# Altium PCB huaynaggui.PcbDoc
Units mil, origin at the board's own origin, x right, y up, seen from the top; angles counter-clockwise.
Board outline 3346.53 x 2645.3 mil, 2 copper layers (Top Layer, Bottom Layer); 42 components, 58 nets, 220 pads, 21 vias.
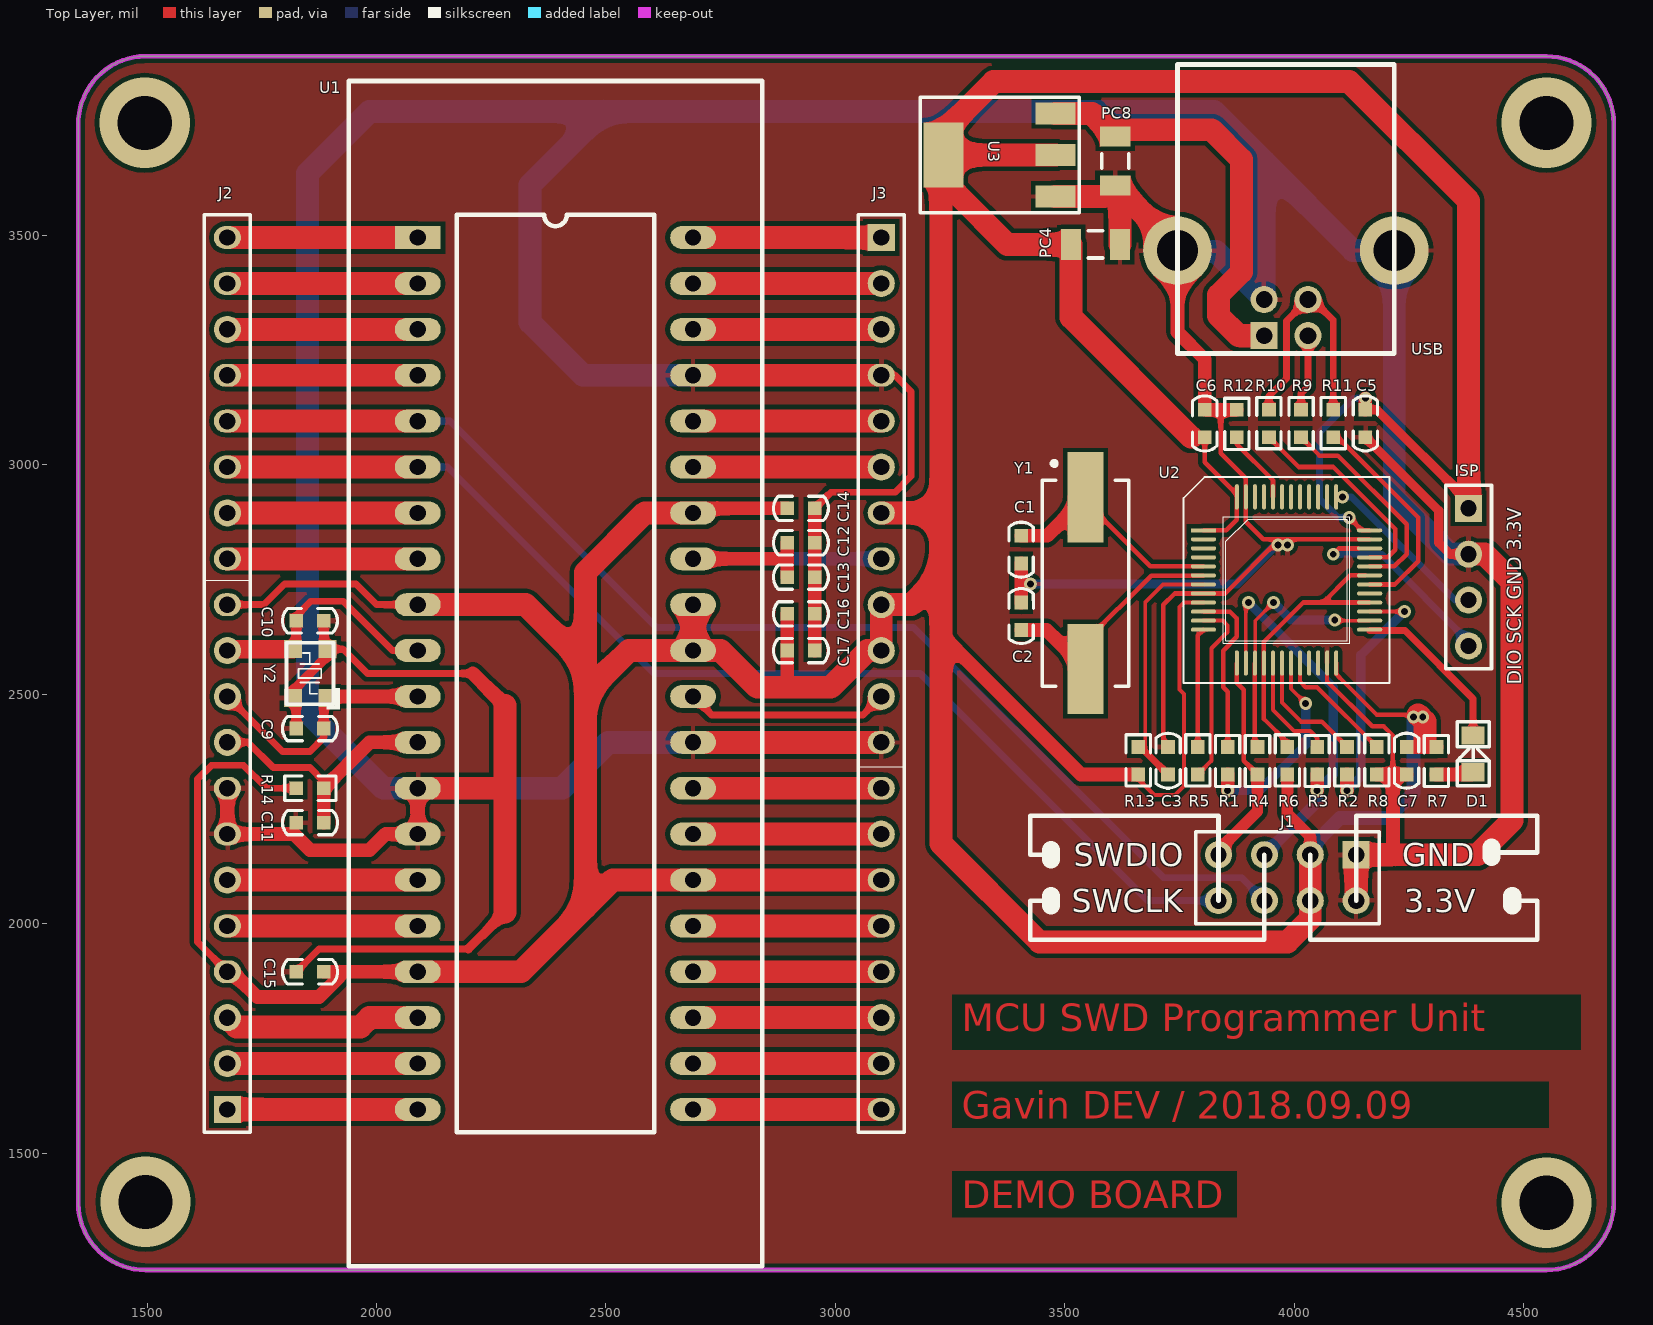
[diagram p0: Top Layer view]
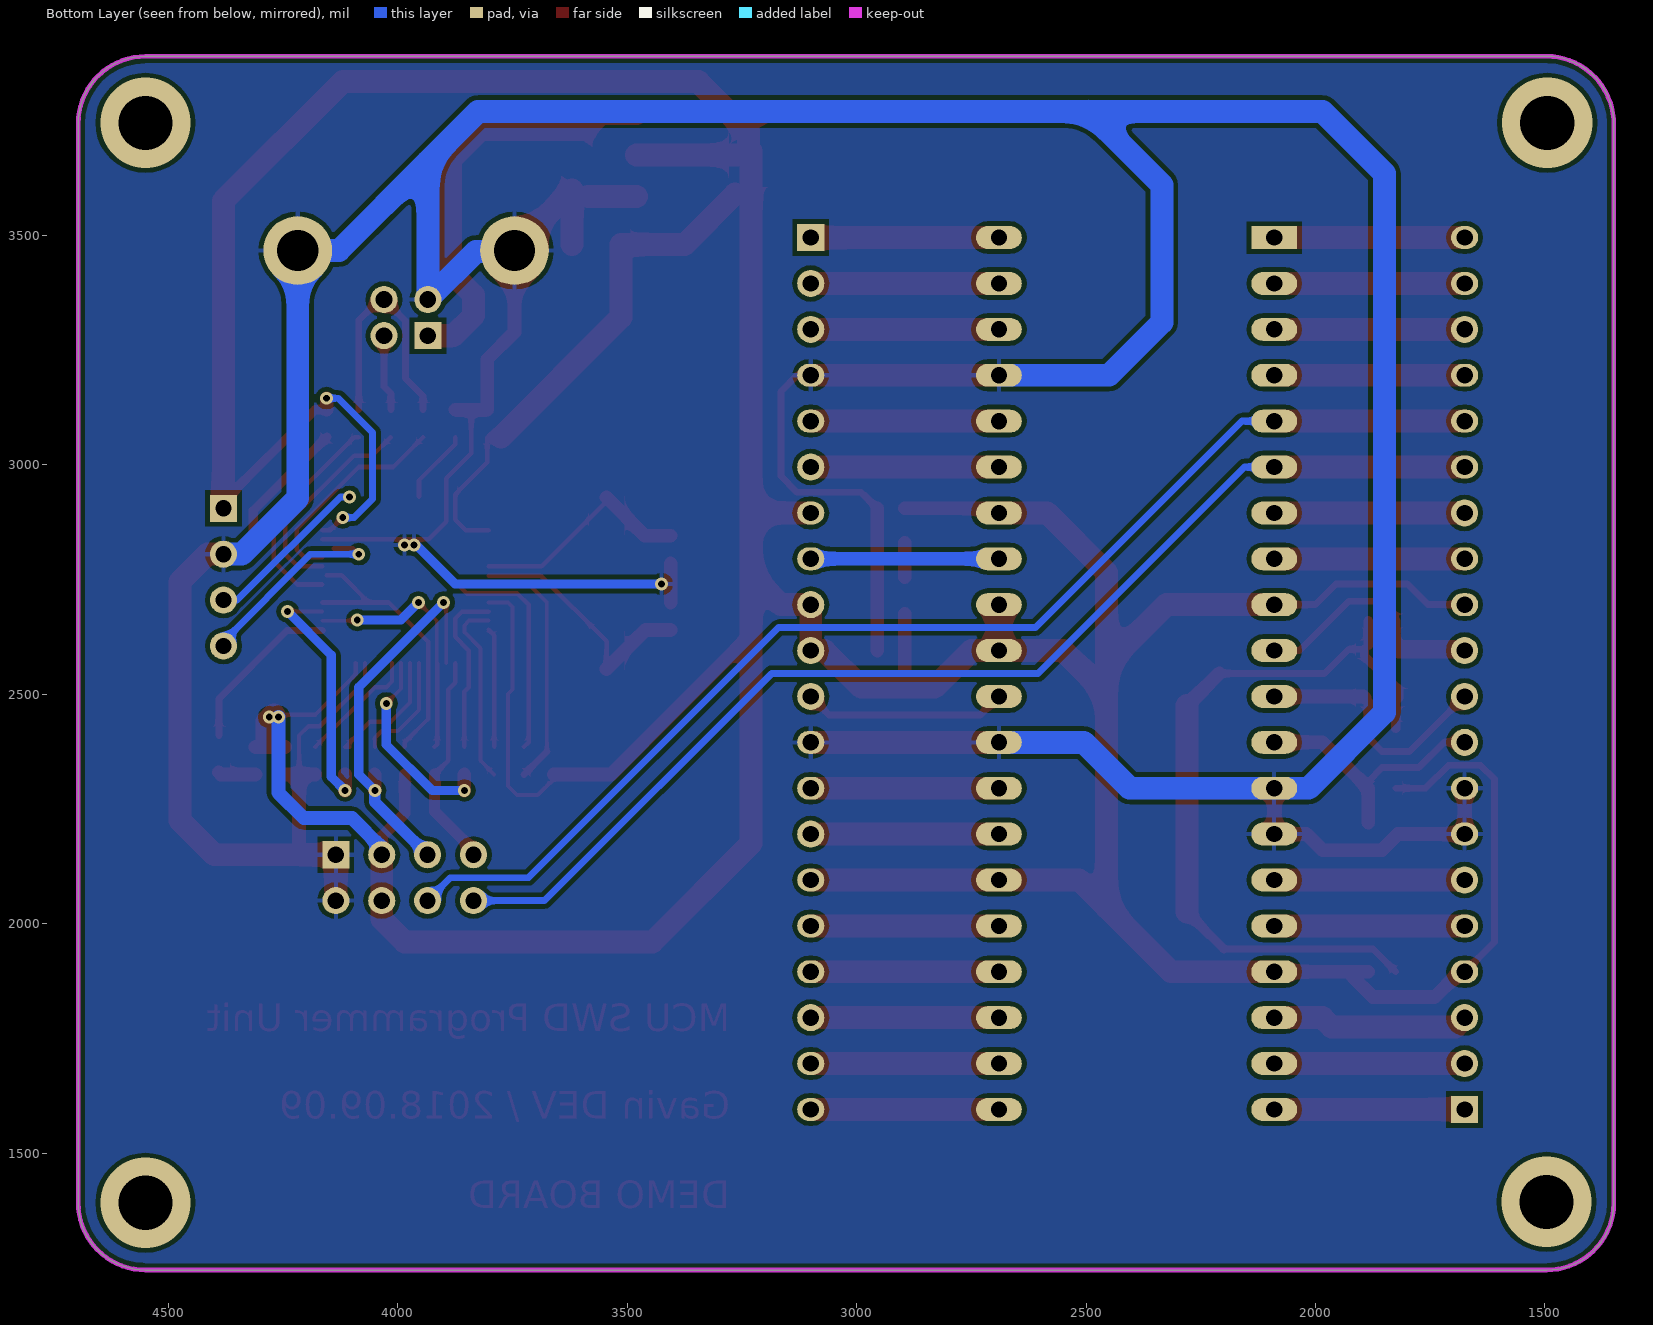
[diagram p1: Bottom Layer view, seen from below]

## Layer stack, top to bottom
Top Solder: solder mask 0.4, Solder Resist, Dk 3.5
Top Layer: signal copper 1.4
Dielectric 1: dielectric 12.6, FR-4, Dk 4.8
Bottom Layer: signal copper 1.4
Bottom Solder: solder mask 0.4, Solder Resist, Dk 3.5

## Board outline
1349.93,1390.03 ccw(c1496.38,1391.46) 1496.38,1245 4550,1245 ccw(c4550,1391.46) 4696.46,1391.46 4696.46,3743.54 ccw(c4550,3743.54) 4550,3890 1496.41,3890 1496.41,3890.3 ccw(c1497.48,3742.8) 1350,3740

## Design rules (kind name [scope] priority, off if disabled: settings)
Clearance [All] p1: gap=10 ignorepadtopadclearanceinfootprint=FALSE except(0: Arc-Hole Track-Hole SMDPad-Hole THPad-Hole Via-Hole Fill-Hole Poly-Hole Region-Hole Text-Hole)
PolygonConnect [All] p1: connectstyle=Relief reliefconductorwidth=10 reliefentries=4 polygonreliefangle="90 Angle" airgapwidth=10
RoutingVias [All] p1: holewidth=28 width=50 viastyle="Through Hole" minholewidth=28 minwidth=50 maxholewidth=28 maxwidth=50
SolderMaskExpansion [All] p1: expansion=4
Width [All] p1: maxlimit=500 minlimit=8 preferedwidth=10 minimp=50.000000 maximp=50.000000 favimp=50.000000
30 further rules are at their usual default settings.

## Components (designator, comment, footprint, x,y, rotation, side; value= is the part's Value field where it differs from the comment)
C1 "" C0603 3405,2845 r270 top value=22pF
C2 "" C0603 3405,2640 r90 top value=22pF
C3 "" C0603 3725,2325 r90 top value=0.1uF
C5 "" C0603 4155,3120 r270 top value=22pF
C6 "" C0603 3805,3060 r90 top value=22pF
C7 "" C0603 4245,2385 r270 top value=22pF
C9 "" C0603 1885,2425 r180 top value=10pF
C10 "" C0603 1825,2660 r0 top value=10pF
C11 "" C0603 1885,2220 r180 top value=0.1uF
C12 "" C0603 2895,2830 r0 top value=0.1uF
C13 "" C0603 2895,2755 r0 top value=1uF
C14 "" C0603 2895,2905 r0 top value=220nF
C15 "" C0603 1885,1895 r180 top value=10pF
C16 "" C0603 2895,2675 r0 top value=10uF
C17 "" C0603 2895,2595 r0 top value=1uF
D1 "LED" D-0805 4396,2370 r90 top
ISP "SWD" HDR1X4 4380,2905 r270 top (schematic designator ISP1)
J1 "Header2*4" HDR2X4 4135,2150 r180 top
J2 "Header1X20" HDR2.54-1X20 1675,1545 r90 top
J3 "Header1X20" HDR2.54-1X20 3100,3545 r270 top
PC4 "" C1206 3566.85,3480 r0 top value=100uF
PC8 "" C1206 3610,3661.85 r270 top value=100uF
R1 "" R0603 3855,2325 r90 top value=100
R2 "" R0603 4115,2385 r270 top value=100
R3 "" R0603 4050,2325 r90 top value=100
R4 "" R0603 3920,2325 r90 top value=100
R5 "" R0603 3790,2385 r270 top value=100
R6 "" r0603 3985,2385 r270 top value=1K
R7 "" R0603 4310,2325 r90 top value=1K
R8 "" R0603 4180,2385 r270 top value=10K
R9 "" R0603 4015,3120 r270 top value=100
R10 "" R0603 3945,3120 r270 top value=100
R11 "" R0603 4085,3120 r270 top value=1K
R12 "" R0603 3875,3060 r90 top value=10K
R13 "" R0603 3660,2385 r270 top value=10K
R14 "" R0603 1885,2295 r180 top value=10K
U1 "TestBench_40pin" DIP40 2390,3545 r0 top
U2 "STM32F103C8T6" LQFP-48 3984.25,2749.88 r0 top
U3 "AMS1117-3.3V" SOT-223 3373,3676.45 r90 top
USB "USB-B" USB-B 3934.33,3281.26 r0 top (schematic designator J4)
Y1 "8MHz" XTAL-SMD2 3545,2929.01 r270 top
Y2 "XTL-P4" X3225 1855,2545 r90 top

## Footprints (in the part's own frame and the unit in brackets; to place one, negate y for a bottom-side part, rotate by r counter-clockwise, add the part's x,y. Pads: shape width x height; smd on the part's side, far side on the other; paste and mask are expansions set on the pad)
C0603 [mil]
  rect 30x30 smd: 1(0,0) 2(60,0)
  silkscreen extent -30,-27 90,27, body extent -1,-16 62,15, height 24
C1206 [mm] "Chip Capacitor, Body 3.2x1.6mm, IPC High Density"
  rect 1.1x1.7 smd: 1(-1.35,0) 2(1.35,0)
  silkscreen extent -0.4,-0.75 0.4,0.75, body extent -1.7,-0.9 1.7,0.9, height 1.3
D-0805 [mil]
  rect 40x50 smd: 1(-40,6) 2(40,6)
  silkscreen extent -70,-29 70,41, body extent -40,-11 41,25, height 33
DIP40 [mm]
  rect 2.54x1.27 hole 0.9: 1(-7.62,-1.27)
  oval 2.54x1.27 hole 0.9: 2(-7.62,-3.81) 3(-7.62,-6.35) 4(-7.62,-8.89) 5(-7.62,-11.43) 6(-7.62,-13.97) 7(-7.62,-16.51) 8(-7.62,-19.05) 9(-7.62,-21.59) 10(-7.62,-24.13) 11(-7.62,-26.67) 12(-7.62,-29.21) 13(-7.62,-31.75) 14(-7.62,-34.29) 15(-7.62,-36.83) 16(-7.62,-39.37) 17(-7.62,-41.91) 18(-7.62,-44.45) 19(-7.62,-46.99) 20(-7.62,-49.53) 21(7.62,-49.53) 22(7.62,-46.99) 23(7.62,-44.45) 24(7.62,-41.91) 25(7.62,-39.37) 26(7.62,-36.83) 27(7.62,-34.29) 28(7.62,-31.75) 29(7.62,-29.21) 30(7.62,-26.67) 31(7.62,-24.13) 32(7.62,-21.59) 33(7.62,-19.05) 34(7.62,-16.51) 35(7.62,-13.97) 36(7.62,-11.43) 37(7.62,-8.89) 38(7.62,-6.35) 39(7.62,-3.81) 40(7.62,-1.27)
  silkscreen extent -11.45,-58.2 11.45,7.4
HDR1X4 [mm] "Connector; Header; 4 Position"
  rect 1.5x1.5 hole 0.9: 1(0,0)
  round 1.5 hole 0.9: 2(2.54,0) 3(5.08,0) 4(7.62,0)
  silkscreen extent -1.27,-1.27 8.89,1.27
HDR2.54-1X20 [mm]
  rect 1.5x1.5 hole 0.9: 1(1.27,0)
  round 1.5 hole 0.9: 2(3.81,0) 3(6.35,0) 6(13.97,0) 9(21.59,0) 10(24.13,0) 11(26.67,0) 14(34.29,0) 18(44.45,0)
  oval 1.27x1.5 hole 0.9: 4(8.89,0) 5(11.43,0) 7(16.51,0) 8(19.05,0) 12(29.21,0) 13(31.75,0) 15(36.83,0) 16(39.37,0) 17(41.91,0) 19(46.99,0) 20(49.53,0)
  silkscreen extent 0,-1.27 50.8,1.27, body extent 0,-1.27 50.8,1.27, height 0.7
HDR2X4 [mm] "Connector; Header; 4x2 Position"
  rect 1.5x1.5 hole 0.9: 1(0,0)
  round 1.5 hole 0.9: 2(0,2.54) 3(2.54,0) 4(2.54,2.54) 5(5.08,0) 6(5.08,2.54) 7(7.62,0) 8(7.62,2.54)
  silkscreen extent -1.27,-1.27 8.89,3.81
LQFP-48 [mm]
  rect 1.4x0.22 smd: 1(-4.625,2.725)
  oval 1.4x0.22 smd: 2(-4.625,2.225) 3(-4.625,1.725) 4(-4.625,1.225) 5(-4.625,0.725) 6(-4.625,0.225) 7(-4.625,-0.275) 8(-4.625,-0.775) 9(-4.625,-1.275) 10(-4.625,-1.775) 11(-4.625,-2.275) 12(-4.625,-2.775) 25(4.575,-2.775) 26(4.575,-2.275) 27(4.575,-1.775) 28(4.575,-1.275) 29(4.575,-0.775) 30(4.575,-0.275) 31(4.575,0.225) 32(4.575,0.725) 33(4.575,1.225) 34(4.575,1.725) 35(4.575,2.225) 36(4.575,2.725)
  oval 0.22x1.4 smd: 13(-2.775,-4.625) 14(-2.275,-4.625) 15(-1.775,-4.625) 16(-1.275,-4.625) 17(-0.775,-4.625) 18(-0.275,-4.625) 19(0.225,-4.625) 20(0.725,-4.625) 21(1.225,-4.625) 22(1.725,-4.625) 23(2.225,-4.625) 24(2.725,-4.625) 37(2.725,4.575) 38(2.225,4.575) 39(1.725,4.575) 40(1.225,4.575) 41(0.725,4.575) 42(0.225,4.575) 43(-0.275,4.575) 44(-0.775,4.575) 45(-1.275,4.575) 46(-1.775,4.575) 47(-2.275,4.575) 48(-2.775,4.575)
  silkscreen extent -5.72,-5.72 5.67,5.67, body extent -4.53,-4.53 4.47,4.47, height 1.45
R0603 [mil]
  rect 30x30 smd: 1(0,0) 2(60,0)
  silkscreen extent -26,-26 85,27, body extent -1,-16 62,15, height 18
r0603 [mil]
  rect 30x30 smd: 1(0,0) 2(60,0)
  silkscreen extent -27,-27 85,27, body extent -1,-16 62,15, height 18
SOT-223 [mm]
  rect 1.2x2.2 smd: 1(-2.337,-2.718) 2(-0.037,-2.718) 3(2.263,-2.718)
  rect 3.6x2.2 smd: 4(-0.037,3.482)
  silkscreen extent -3.24,-4.02 3.16,4.78, body extent -3.3,-3.02 3.2,3.94
USB-B [mm]
  rect 1.5x1.5 hole 0.92: 1(0,0)
  round 1.5 hole 0.92: 2(2.43,0) 3(2.43,2) 4(0,2)
  round 3.8 hole 2.28: 5(-4.793,4.713) 5(7.207,4.713)
  silkscreen extent -4.79,-0.99 7.21,15.01, body extent -6.13,-0.91 8.72,15.39, height 3.13
X3225 [mil]
  rect 39.37x39.37 smd: 1(-53,-38) 2(53,-38) 3(53,37) 4(-53,37)
  silkscreen extent -78,-65 67,51, body extent -61,-50 65,48, height 28
XTAL-SMD2 [mm]
  rect 5x2 smd: 1(0,0) 2(9.5,0)
  silkscreen extent -2,-2.4 10.45,2.4, body extent -1.95,-2.46 11.45,2.44, height 4

## Part data
C1 C2 C3 C5 C6 C7 C9 C10 C11 C12 C13 C14 C15 C16 C17: library part Cap, "Capacitor", LatestRevisionDate=17-Jul-2002, LatestRevisionNote="Re-released for DXP Platform.", PackageReference=RAD-0.3, Published=8-Jun-2000, Publisher="Altium Limited"
D1: library part LED2, "Typical RED, GREEN, YELLOW, AMBER GaAs LED", LatestRevisionDate=17-Jul-2002, LatestRevisionNote="Re-released for DXP Platform.", PackageReference=3.2X1.6X1.1, PackageVersion=Feb-2002, Published=8-Jun-2000, Publisher="Altium Limited"
ISP: library part "Header 4", "Header, 4-Pin", LatestRevisionDate=17-Jul-2002, LatestRevisionNote="Re-released for DXP Platform.", Publisher="Altium Limited"
J1: library part Header2X4
PC4 PC8: library part "Cap Pol3", "Polarized Capacitor (Surface Mount)", LatestRevisionDate=29-May-2009, LatestRevisionNote="IPC-7351 Footprint Added.", PackageDescription="Chip Capacitor", PackageReference=C0805, Published=8-Jun-2000, Publisher="Altium Limited"
R1 R2 R3 R4 R5 R6 R7 R8 R9 R10 R11 R12 R13 R14: library part Res2, "Resistor", LatestRevisionDate=17-Jul-2002, LatestRevisionNote="Re-released for DXP Platform.", PackageReference=AXIAL-0.4, Published=8-Jun-2000, Publisher="Altium Limited"
Y1: library part XTAL, "Crystal Oscillator", LatestRevisionDate=17-Jul-2002, LatestRevisionNote="Re-released for DXP Platform.", PackageReference=R38, Published=8-Jun-2000, Publisher="Altium Limited"

## Via types
v1: diameter 28, hole 15, Top Layer to Bottom Layer, 17 vias
v2: diameter 196.85, hole 118.11, Top Layer to Bottom Layer, 4 vias

## Nets (pads, with @x,y where several pads share a name; then routed paths per layer and width w, separated by ;. In a path a pad name is that pad's centre, name@x,y a point inside that pad or via, vN(x,y) a via of type N, cw(c..) or ccw(c..) an arc to the next point about the centre after c; other vN are vias at no path point)
GND: C1.2 C2.2 C3.2 C5.2 C6.2 C7.2 C9.2 C10.2 C11.2 C12.2 C13.2 C14.2 C15.2 C16.2 C17.2 ISP.2 J1.1 J1.2 J2.7 J2.8 J3.4 J3.12 PC4.2 PC8.2 R8.2 R12.2 U1.13 U1.14 U1.29 U1.37 U2.8 U2.23 U2.35 U2.47 U3.1 USB.4 USB.5 Y2.2 Y2.4 | length 15754.7
  Top Layer w9: U2.23 4071.85,2528.15 4170,2430 4195,2430 4215,2410 4215,2325
  Top Layer w10: C3.2 3715,2395 3715,2695 3739.37,2719.37 U2.8 3849.37,2719.37 v1@3967.48,2837.48 ; 3840,3120 3840,3025 3894.68,2970.32 U2.47 3894.68,2875.32 3932.52,2837.48 v1@3967.48,2837.48 ; U2.35 v1@3967.48,2837.48
  Top Layer w15: C15.2 1875,1945 2200,1945 ; Y2.2@1885,2606 Y2.2 1927,2598 1980,2545 2210,2545 ; C14.2 2990,2940 3130,2940 3165,2975 3165,3160 3130,3195 J3.4
  Top Layer w20: C9.2 1825,2485 Y2.4 1818,2508 1893,2583 Y2.2 ; Y2.2@1885,2606 C10.2 ; 2200,1945 2280,2025 ; C5.2 4315,2900 4315,2830 4340,2805 ISP.2
  Top Layer w30: J2.8 J2.7 1820,2195 1855,2160 1985,2160 2020,2195 U1.14 U1.13 ; 2210,2545 2280,2475 ; C17.2 C16.2 C13.2 C12.2 C14.2 ; C2.2 C1.2 ; USB.5@3745.62,3430.55 3745.62,3289.38 3805,3230 C6.2 3840,3120 R12.2 ; R8.2 4215,2325 ; 4220,2150 4215,2155 4215,2325 ; C7.2 4215,2325
  Top Layer w50: U1.13 2275,2295 2280,2300 ; 2280,2025 2280,2300 ; 2280,2475 2280,2300 ; U1.29 J3.12 ; U1.37 J3.4 ; U3.1 3585.75,3584.45 ; PC4.2 3620,3598.7 3745.62,3473.08 3745.62,3466.81 USB.5@3745.62,3430.55 ; J1.2 J1.1 4220,2150 4400,2150 4475,2225 4475,2745 4415,2805 ISP.2
  Bottom Layer w20: v1(3425,2740) 3875,2740 3960,2825 v1(3965,2825) v1(3985,2825)
  Bottom Layer w50: U1.29 2505,2395 2405,2295 U1.13 2015,2295 1850,2460 1850,3635 1985,3770 2495,3770 ; U1.37 2450,3195 2335,3310 2335,3610 2495,3770 ; USB.5@3745.62,3430.55 3780.07,3465 3829.33,3465 USB.4 3934.33,3660.67 ; USB.5@4218.06,3430.55 4218.06,2926.94 4340,2805 ISP.2 ; USB.5@4218.06,3466.81 4128.19,3466.81 3934.33,3660.67 ; 2495,3770 3825,3770 3934.33,3660.67
HFXTAL_N: C10.1 J2.11 U1.10 Y2.3 | length 542.1
  Top Layer w15: Y2.3 Y2.3@1825,2605 ; C10.1 1825,2670 1857.5,2702.5 1927.5,2702.5 2035,2595 U1.10
  Top Layer w20: Y2.3@1825,2605 C10.1
  Top Layer w40: J2.11 1678,2598 Y2.3
HFXTAL_P: C9.1 J2.10 U1.11 Y2.1 | length 560.7
  Top Layer w15: J2.10 1795,2375 1855,2375 1885,2405 C9.1
  Top Layer w20: C9.1 1885,2484 Y2.1
  Top Layer w30: Y2.1 1896,2495 U1.11
JTCK: ISP.3 U2.37 | length 368.2
  Bottom Layer w15: v1(4105,2930) 4125,2930 4350,2705 ISP.3
JTMS: ISP.4 U2.34 | length 443.9
  Top Layer w10: v1(4085,2805) 4097.44,2817.44 U2.34@4140,2817.44
  Bottom Layer w15: v1(4085,2805) 4190,2805 4380,2615 ISP.4
LED: D1.2 U2.25 | length 367.1
  Top Layer w15: U2.25@4164.37,2638.48 4241.52,2638.48 4390,2490 D1.2
NetC12_1: C12.1 C13.1 J3.8 U1.33 | length 691
  Top Layer w30: U1.33 2892.5,2795 2895,2792.5 ; C13.1 2895,2792.5 ; C12.1 2895,2792.5
  Bottom Layer w30: U1.33 J3.8
NetD1_1: D1.1 R7.1 | length 82.1
  Top Layer w30: R7.1 4385,2325 D1.1
NetJ2_1: J2.1 U1.20 | length 415
  Top Layer w50: J2.1 U1.20
NetJ2_2: J2.2 U1.19 | length 415
  Top Layer w50: J2.2 U1.19
NetJ2_3: J2.3 U1.18 | length 431.6
  Top Layer w50: J2.3 1695,1775 1965,1775 1985,1795 U1.18
NetJ2_13: J2.13 U1.8 | length 415
  Top Layer w50: J2.13 U1.8
NetJ2_14: J2.14 U1.7 | length 415
  Top Layer w50: J2.14 U1.7
NetJ2_17: J2.17 U1.4 | length 415
  Top Layer w50: J2.17 U1.4
NetJ2_18: J2.18 U1.3 | length 415
  Top Layer w50: J2.18 U1.3
NetJ2_19: J2.19 U1.2 | length 415
  Top Layer w50: J2.19 U1.2
NetJ2_20: J2.20 U1.1 | length 415
  Top Layer w50: J2.20 U1.1
NetJ3_1: J3.1 U1.40 | length 410
  Top Layer w50: U1.40 J3.1
NetJ3_2: J3.2 U1.39 | length 410
  Top Layer w50: U1.39 J3.2
NetJ3_3: J3.3 U1.38 | length 410
  Top Layer w50: U1.38 J3.3
NetJ3_16: J3.16 U1.25 | length 410
  Top Layer w50: U1.25 J3.16
NetJ3_17: J3.17 U1.24 | length 410
  Top Layer w50: U1.24 J3.17
NetJ3_18: J3.18 U1.23 | length 410
  Top Layer w50: U1.23 J3.18
NetJ3_19: J3.19 U1.22 | length 410
  Top Layer w50: U1.22 J3.19
NetJ3_20: J3.20 U1.21 | length 410
  Top Layer w50: U1.21 J3.20
NetJ4_2: R9.1 USB.2 | length 167.5
  Top Layer w15: R9.1 4015,3155 4030,3170 USB.2
NetJ4_3: R10.1 R11.1 USB.3 | length 543.8
  Top Layer w15: R10.1 3945,3150 3982.97,3187.97 3982.97,3312.97 USB.3 4040,3360 4085,3315 R11.1
NetR8_1: R8.1 U2.20 | length 266.7
  Top Layer w9: U2.20 4012.79,2527.21 4025,2515 4050,2515 R8.1
NetR12_1: R12.1 U2.44 | length 162.6
  Top Layer w10: R12.1 3875,3045 3953.74,2966.26 U2.44
NRST: C3.1 R13.1 U2.7 | length 539.1
  Top Layer w8: 3675,2375 3675,2700 3714.05,2739.05 U2.7
  Top Layer w15: 3675,2375 C3.1
OSC_IN: C1.1 U2.5 Y1.1 | length 499.6
  Top Layer w10: Y1.1 3545,2920 3686.58,2778.42 U2.5
  Top Layer w30: C1.1 3460.99,2845 Y1.1
OSC_OUT: C2.1 U2.6 Y1.2 | length 551.8
  Top Layer w10: Y1.2 3545,2615 3688.42,2758.42 U2.6@3802.16,2758.42
  Top Layer w30: C2.1 3460,2640 Y1.2
P15: J2.6 U1.15 | length 415
  Top Layer w50: J2.6 U1.15
P16: J2.5 U1.16 | length 415
  Top Layer w50: J2.5 U1.16
P27: J3.14 U1.27 | length 410
  Top Layer w50: U1.27 J3.14
P28: J3.13 U1.28 | length 410
  Top Layer w50: U1.28 J3.13
P30: J3.11 U1.30 | length 443.1
  Top Layer w15: U1.30 2730,2455 3060,2455 J3.11
P35: J3.6 U1.35 | length 410
  Top Layer w50: U1.35 J3.6
P36: J3.5 U1.36 | length 410
  Top Layer w50: U1.36 J3.5
RESETn: C11.1 J2.9 R14.1 U1.12 | length 581.6
  Top Layer w15: J2.9 1720,2395 1775,2340 1855,2340 1885,2310 R14.1
  Top Layer w30: C11.1 R14.1 1985,2395 U1.12
SWCLK: J1.6 J2.16 U1.5 | length 2692.9
  Top Layer w50: J2.16 U1.5
  Bottom Layer w15: U1.5 2160,3095 2610,2645 3170,2645 3715,2100 3885,2100 J1.6
SWDIO: J1.8 J2.15 U1.6 | length 2551.4
  Top Layer w50: J2.15 U1.6
  Bottom Layer w15: U1.6 2155,2995 2605,2545 3185,2545 3680,2050 J1.8
TCKIN: J1.7 R4.1 U2.13 | length 471.6
  Top Layer w10: U2.13 3875,2525 3890,2510 3890,2355 R4.1
  Top Layer w25: J1.7 3835,2160 3920,2245 R4.1
TCKOUT: R4.2 U2.15 U2.26 | length 560.1
  Top Layer w8: U2.15 3915,2568.43 3915,2660 v1(3955,2700) ; v1(4088.33,2661.67) 4089.69,2660.31 U2.26
  Top Layer w10: U2.15@3914.05,2567.79 3914.05,2390.95 R4.2
  Bottom Layer w20: v1(3955,2700) 3993.33,2661.67 v1(4088.33,2661.67)
TDIIN: R2.1 U2.18 | length 277.8
  Top Layer w9: U2.18 3973.42,2481.58 4015,2440 4060,2440 R2.1 R2.1@4105,2385
TDIOUT: R2.2 U2.27 | length 552.4
  Top Layer w8: U2.27 v1(4240,2680)
  Top Layer w30: v1(4115,2290) R2.2
  Bottom Layer w20: v1(4115,2290) 4145,2320 4145,2585 v1(4240,2680)
TDOIN: R6.1 U2.16 U2.28 U2.31 | length 632.4
  Top Layer w10: R6.1 3985,2395 3934.05,2445.95 U2.16 3934.05,2614.05 4019.68,2699.68 4063.11,2699.68 ; U2.31@4155,2759.09 4122.52,2759.09 4063.11,2699.68 ; U2.28 4063.11,2699.68
TMSIN: J1.5 R3.1 U2.14 | length 858.2
  Top Layer w8: U2.14 3894.68,2694.68 v1(3900,2700)
  Top Layer w30: v1(4050,2290) R3.1
  Bottom Layer w20: v1(3900,2700) 4085,2515 4085,2325 v1(4050,2290)
  Bottom Layer w25: J1.5 4050,2265 v1(4050,2290)
TMSOUT: R3.2 U2.17 | length 243
  Top Layer w9: U2.17@3954.05,2567.79 3954.05,2465.95 4000,2420 4035,2420 4050,2405 R3.2
TRESIN: R5.1 U2.12 | length 260.7
  Top Layer w10: R5.1 3790,2628.47 U2.12
TRESOUT: R5.2 U2.11 | length 409
  Top Layer w9: R5.2 3820,2355 3820,2600 3855,2635 3855,2650 3844.69,2660.31 U2.11
TRSTIN: R1.1 U2.19 | length 437.4
  Top Layer w8: U2.19 3993.11,2511.89 v1(4025,2480)
  Top Layer w30: v1(3855,2290) R1.1
  Bottom Layer w20: v1(3855,2290) 3925,2290 4025,2390 v1(4025,2480)
TRSTOUT: R1.2 U2.10 | length 375.6
  Top Layer w10: U2.10 3860,2680 3875,2665 3875,2625 3845,2595 3845,2515 3855,2505 R1.2
USBD+: R10.2 U2.33 | length 465.3
  Top Layer w10: R10.2 4010,2995 4085,2995 4220,2860 4220,2815 4203.42,2798.42 U2.33@4164.37,2798.42
USBD-: R9.2 U2.32 | length 465.3
  Top Layer w10: R9.2 4055,3020 4095,3020 4245,2870 4245,2805 4218.42,2778.42 U2.32
USBD_EN: R11.2 U2.30 | length 479.2
  Top Layer w10: R11.2 4095,3060 4270,2885 4270,2790 4219.06,2739.06 U2.30
V5.0: PC8.1 U3.3 USB.1 | length 924.8
  Top Layer w50: U3.3 3559.45,3765.55 3595,3730 3820,3730 3885,3665 3885,3420 3835,3370 3835,3325 3878.74,3281.26 USB.1
VCC: C5.1 C6.1 C7.1 C14.1 C15.1 C16.1 C17.1 ISP.1 J1.3 J1.4 J2.4 J2.12 J3.7 J3.9 J3.10 J3.15 PC4.1 R6.2 R7.2 R13.2 R14.2 U1.9 U1.17 U1.26 U1.31 U1.32 U1.34 U2.1 U2.9 U2.24 U2.36 U2.48 U3.2 U3.4 | length 14654.6
  Top Layer w9: R13.2 3660,2315 3695,2280 3740,2280 3760,2300 3760,2500 3750,2510 3750,2690 3759.68,2699.68 U2.9 ; U2.24 4091.53,2543.47 4180,2455 4255,2455 v1(4260,2450)
  Top Layer w10: 3775,3060 C6.1 3805,3005 3874.68,2935.32 3874.68,2879.68 3852.16,2857.16 U2.1 ; v1(4120,2885) 4147.52,2857.48 U2.36@4164.37,2857.48
  Top Layer w15: J2.4 1610,1960 1610,2315 1640,2345 1710,2345 1760,2295 R14.2 ; J2.12 1755,2695 1800,2740 1955,2740 2000,2695 U1.9
  Top Layer w20: C5.1 4180,3120 ISP.1@4380,2920
  Top Layer w25: R6.2 3985,2240 4035,2190 J1.3
  Top Layer w30: J2.4 1685,1895 1740,1840 1875,1840 1920,1885 1920,1895 ; C15.1 1920,1895 ; U1.17 1920,1895 ; U1.34 2700,2905 C14.1 ; C16.1 C17.1 2895,2520 2900,2515 ; 3230,2630 3535,2325 R13.2 ; C5.1 v1(4155,3145) ; C7.1 R7.2
  Top Layer w50: U1.17 2315,1895 2455,2035 ; U1.9 2325,2695 2455,2565 ; U1.32 U1.31 ; U1.34 2585,2895 2455,2765 2455,2565 ; J3.15 U1.26 2515,2095 2455,2035 ; J3.7 3230,2895 ; U3.4@3230,3684.09 U3.4@3230,3669.09 ; 3265,3590 3375,3480 PC4.1 3513.7,3321.3 3775,3060 ; U3.2 U3.4 ; J1.3 J1.4 4035,2010 3985,1960 3445,1960 3230,2175 3230,2630 3230,2760 ; v1@4270,2455 4285,2440 4285,2405 ; ISP.1 4380,2920 4380,3575 4120,3835 3345,3835 3235.91,3725.91 U3.4 ; 2455,2035 2455,2500 ; 2455,2500 2550,2595 U1.31 ; 2455,2500 2455,2565 ; U1.31 2750,2595 2830,2515 2900,2515 2990,2515 3070,2595 J3.10 J3.9 3165,2695 3230,2760 ; 3230,2760 3230,2895 ; 3230,2895 U3.4@3230,3669.09 ; U3.4@3230,3669.09 U3.4
  Bottom Layer w15: v1(4120,2885) 4095,2885 4055,2925 4055,3070 4130,3145 v1(4155,3145)
  Bottom Layer w30: J1.3 4035,2165 4100,2230 4205,2230 4260,2285 v1(4260,2450)
  other v1: 4280,2450
pads on no net: U2.2 U2.3 U2.4 U2.21 U2.22 U2.29 U2.38 U2.39 U2.40 U2.41 U2.42 U2.43 U2.45 U2.46
copper on no net:
  other v2: 4550,1391.46 1496.45,1393.48 1495,3745 4550,3745

## Polygon pours and split planes (outlines as drawn)
no net on Top Layer "NONET_L01_P004" (solid, pour order 4): 1520,3915
GND on Top Layer "GND_L01_P002" (solid, pour order 2): 4585,3890 4600,3875 4605,3880 4610,3880 4630,3860 4640,3860 4665,3835 4665,3825 4690,3800 4690,3765 4696.46,3758.54 4696.46,3690 4696.46,1356.46 4685,1345 4685,1325 4655,1295 4655,1285 4645,1285 4620,1260 4605,1260 4590,1245 4550,1245 1470,1245 1460,1255 1440,1255 1425,1270 1415,1270 1400,1285 1395,1285 1375,1305 1375,1315 1360,1330 1360,1350 1350,1360 1350,3790 1380,3820 1380,3835 1420,3875 1430,3875 1445,3890
GND on Bottom Layer "GND_L02_P010" (solid, pour order 10): 4590,3890 4605,3875 4620,3875 4640,3855 4650,3855 4665,3840 4665,3825 4685,3805 4685,3785 4695,3775 4695,3745 4696.46,3743.54 4696.46,1356.46 4690,1350 4690,1330 4665,1305 4665,1300 4640,1275 4635,1275 4615,1255 4580,1255 4570,1245 1480,1245 1475,1250 1450,1250 1435,1265 1415,1265 1390,1290 1390,1295 1365,1320 1365,1340 1350,1355 1350,3765 1355,3770 1355,3795 1370,3810 1370,3820 1395,3845 1395,3850 1400,3850 1420,3870 1445,3870 1465,3890

## Keep-outs
Keep-Out Layer:
  lines w10: 1349.93,1390.03 ccw(c1496.38,1391.46) 1496.38,1245 4550,1245 ccw(c4550,1391.46) 4696.46,1391.46 4696.46,3743.54 ccw(c4550,3743.54) 4550,3890 1496.41,3890 ; 1350,1390.03 1350,3740 cw(c1497.48,3742.8) 1496.41,3890.3

## Other copper
Top Layer:
  text "MCU SWD Programmer Unit" at 3275,1765 h60
  text "Gavin DEV / 2018.09.09" at 3275,1575 h60
  text "DEMO BOARD" at 3275,1380 h60

## Silkscreen, mask and mechanical layers (free items; w line width, h text height)
Top Overlay:
  lines w10: 3470,2050 3425,2050 3425,1965 3935,1965 3935,2045 3935,2150 ; 3470,2160 3470,2150 3425,2150 3425,2235 3835,2235 3835,2050 ; 4035,2150 4035,1965 4530,1965 4530,2050 4485,2050 ; 4135,2050 4135,2235 4530,2235 4530,2155 4440,2155
  lines w40: 3470,2040 3470,2060 ; 3470,2140 3470,2160 ; 4430,2145 4430,2165 ; 4475,2040 4475,2060
  text "DIO SCK GND 3.3V" at 4495,2520 h30 r90
Top Solder:
  text "MCU SWD Programmer Unit" at 3275,1765 h60
  text "Gavin DEV / 2018.09.09" at 3275,1575 h60
  text "DEMO BOARD" at 3275,1380 h60

## Text inside footprints (layer, text, board x,y; h text height)
J1: Top Overlay "3.3V" at 4240,2025 h50; Top Overlay "GND" at 4235,2125 h50; Top Overlay "SWDIO" at 3520,2125 h50; Top Overlay "SWCLK" at 3515,2025 h50